# Altium PCB main_PCB_v2.0.PcbDoc
Units mil, origin at the board's own origin, x right, y up, seen from the top; angles counter-clockwise.
Board outline 2000 x 1575 mil, 2 copper layers (Top Layer, Bottom Layer); 8 components, 10 nets, 78 pads, 0 vias.
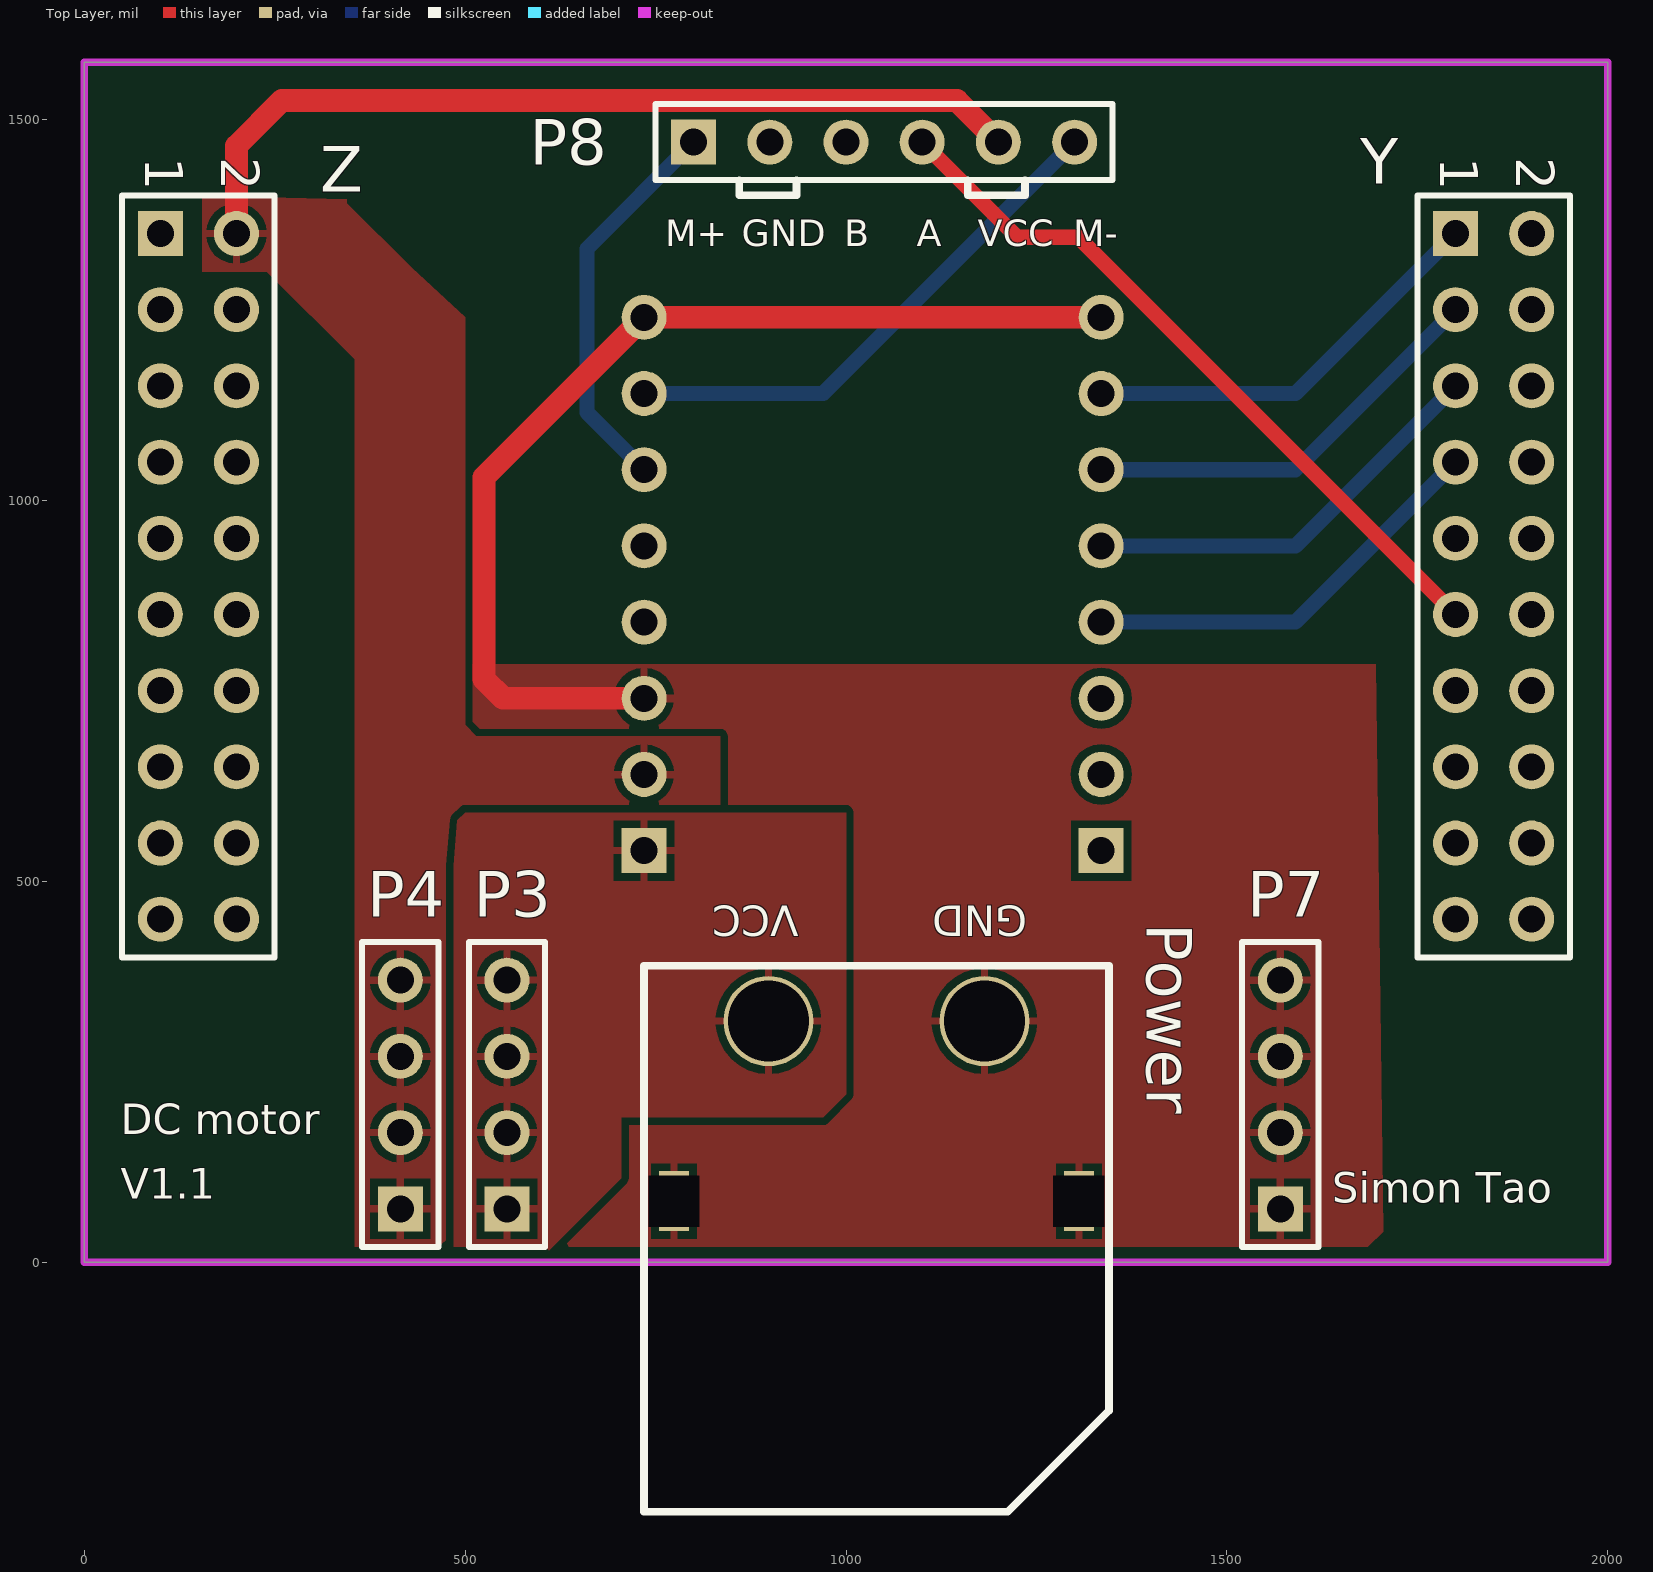
[diagram p0: Top Layer view]
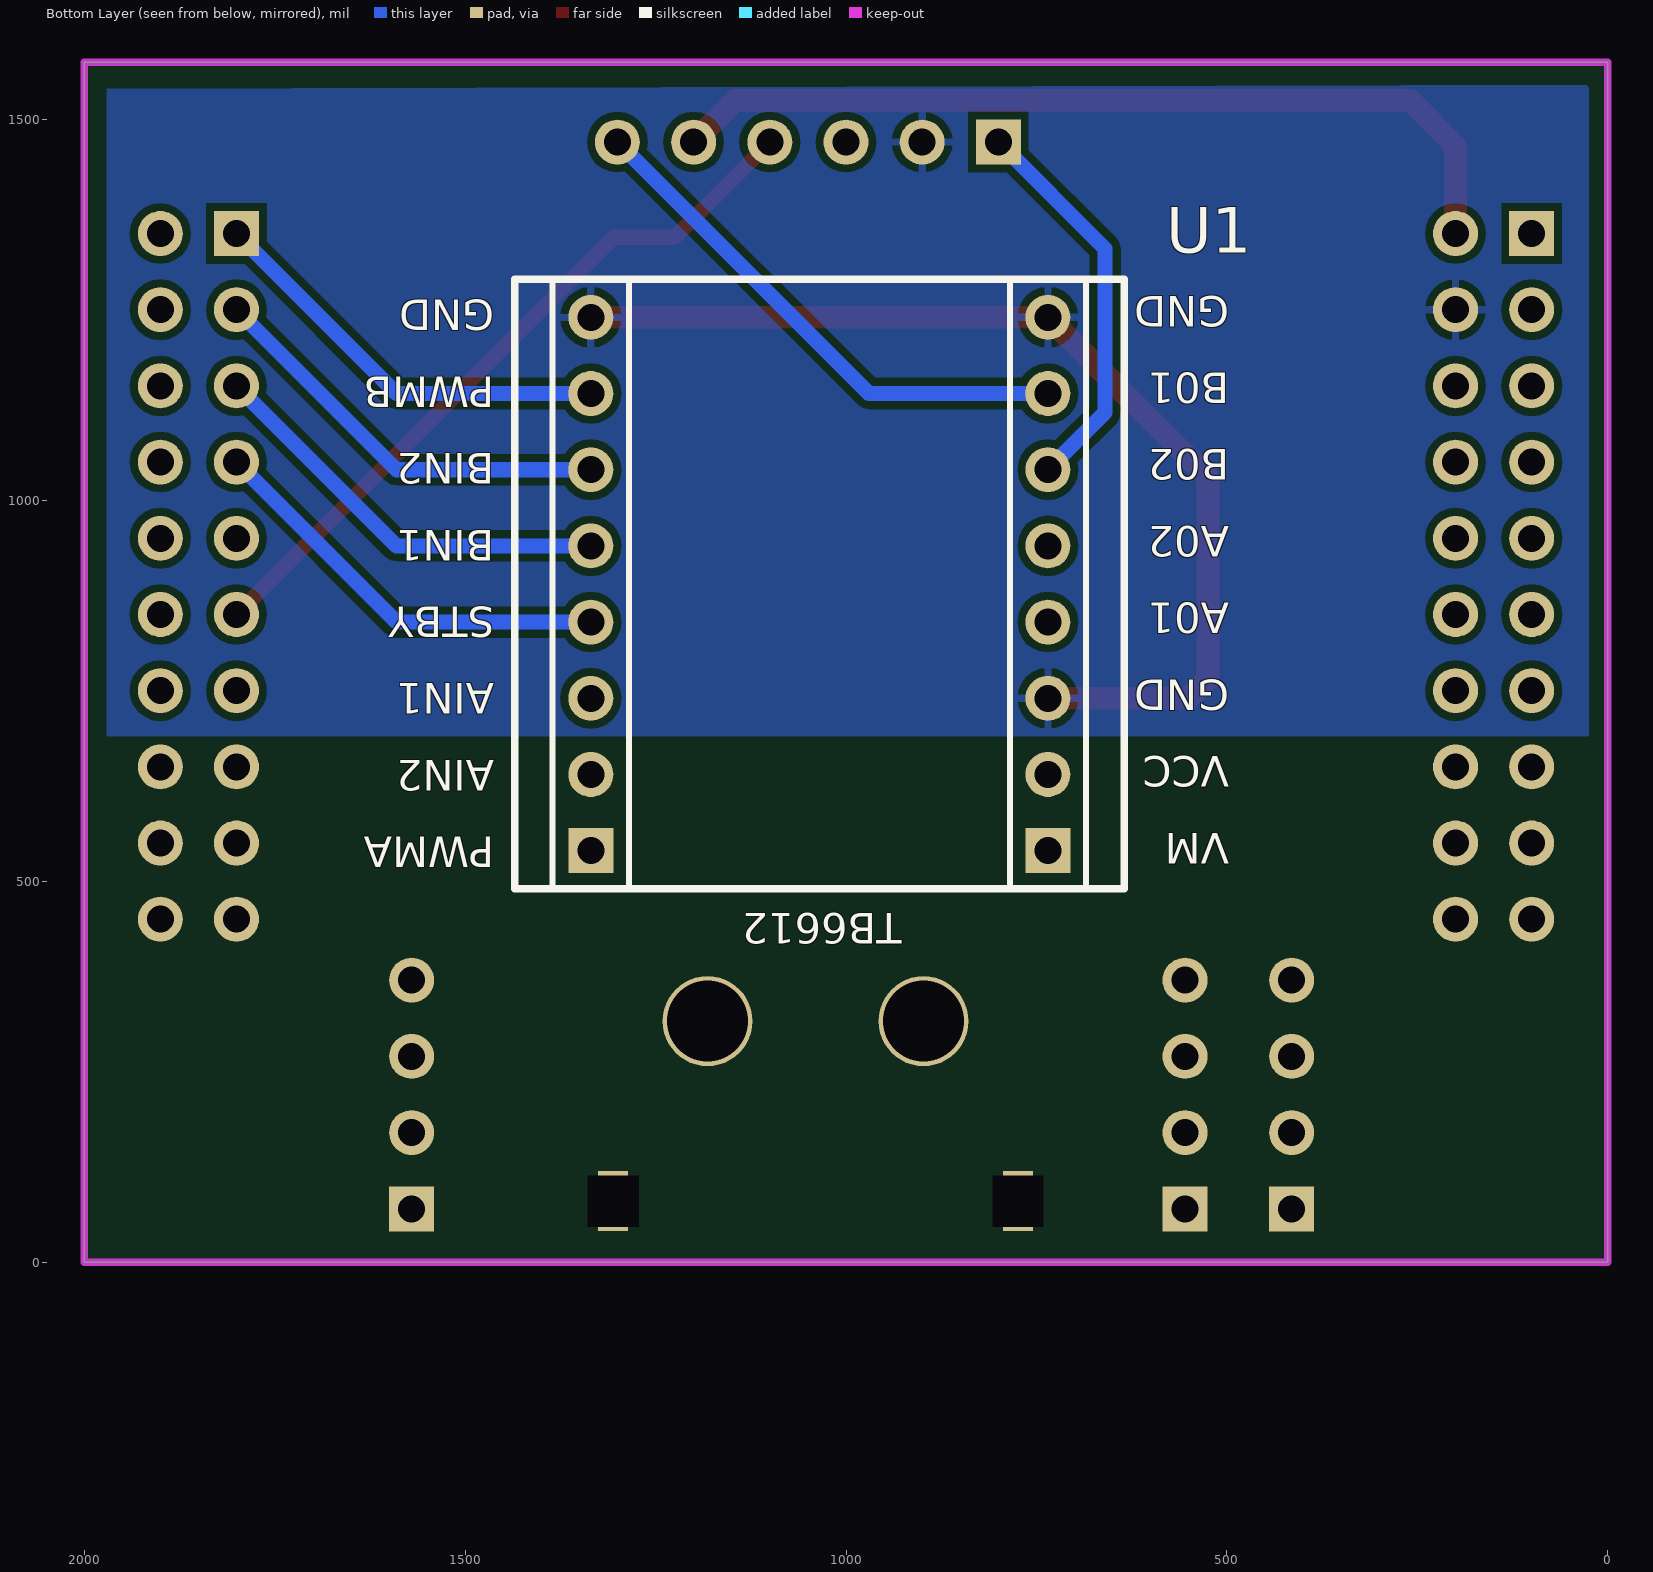
[diagram p1: Bottom Layer view, seen from below]

## Layer stack, top to bottom
Top Solder: solder mask 0.4, Solder Resist, Dk 3.5
Top Layer: signal copper 1.4
Dielectric 1: dielectric 12.6, FR-4, Dk 4.8
Bottom Layer: signal copper 1.4
Bottom Solder: solder mask 0.4, Solder Resist, Dk 3.5

## Board outline
0,0 2000,0 2000,1575 0,1575

## Design rules (kind name [scope] priority, off if disabled: settings)
Clearance [All] p1: gap=10 ignorepadtopadclearanceinfootprint=FALSE except(0: Arc-Hole Track-Hole SMDPad-Hole THPad-Hole Via-Hole Fill-Hole Poly-Hole Region-Hole Text-Hole)
PolygonConnect [All] p1: connectstyle=Relief reliefconductorwidth=10 reliefentries=4 polygonreliefangle="90 Angle" airgapwidth=10
RoutingVias [All] p1: holewidth=28 width=50 viastyle="Through Hole" minholewidth=28 minwidth=50 maxholewidth=28 maxwidth=50
SolderMaskExpansion [All] p1: expansion=4 istentingtop=FALSE
Width [All] p1: maxlimit=100 minlimit=10 preferedwidth=20
30 further rules are at their usual default settings.

## Components (designator, comment, footprint, x,y, rotation, side; value= is the part's Value field where it differs from the comment)
P3 "Header 4" HDR1X4 555,70 r90 top
P4 "Header 4" HDR1X4 415,70 r90 top
P7 "Header 4" HDR1X4 1570,70 r90 top
P8 "Header 6" HDR1X6 800,1470 r0 top
Power "XT60-PW" XT60-PW 1040,80 r180 top
U1 "TB6612_mod" TB6612_mod 1035,905 r0 bottom
Y "Header 10X2" HDR2X10 1800,1350 r270 top
Z "Header 10X2" HDR2X10 100,1350 r270 top

## Footprints (in the part's own frame and the unit in brackets; to place one, negate y for a bottom-side part, rotate by r counter-clockwise, add the part's x,y. Pads: shape width x height; smd on the part's side, far side on the other; paste and mask are expansions set on the pad)
HDR1X4 [mm] "Connector; Header; 4 Position"
  rect 1.5x1.5 hole 0.9: 1(0,0)
  round 1.5 hole 0.9: 2(2.54,0) 3(5.08,0) 4(7.62,0)
  silkscreen extent -1.27,-1.27 8.89,1.27
HDR1X6 [mm] "Connector; Header; 6 Position"
  rect 1.5x1.5 hole 0.9: 1(0,0)
  round 1.5 hole 0.9: 2(2.54,0) 3(5.08,0) 4(7.62,0) 5(10.16,0) 6(12.7,0)
  silkscreen extent -1.27,-1.27 13.97,1.27
HDR2X10 [mm] "Connector; Header; 10x2 Position"
  rect 1.5x1.5 hole 0.9: 1(0,0)
  round 1.5 hole 0.9: 2(0,2.54) 3(2.54,0) 4(2.54,2.54) 5(5.08,0) 6(5.08,2.54) 7(7.62,0) 8(7.62,2.54) 9(10.16,0) 10(10.16,2.54) 11(12.7,0) 12(12.7,2.54) 13(15.24,0) 14(15.24,2.54) 15(17.78,0) 16(17.78,2.54) 17(20.32,0) 18(20.32,2.54) 19(22.86,0) 20(22.86,2.54)
  silkscreen extent -1.27,-1.27 24.13,3.81
TB6612_mod [mm]
  rect 1.5x1.5 hole 0.9: 1(-7.62,9.27) 16(7.62,9.271)
  round 1.5 hole 0.9: 2(-7.62,6.73) 3(-7.62,4.19) 4(-7.62,1.65) 5(-7.62,-0.89) 6(-7.62,-3.43) 7(-7.62,-5.97) 8(-7.62,-8.51) 9(7.62,-8.509) 10(7.62,-5.969) 11(7.62,-3.429) 12(7.62,-0.889) 13(7.62,1.651) 14(7.62,4.191) 15(7.62,6.731)
  silkscreen extent -10.16,-9.78 10.16,10.54
XT60-PW [mm]
  rect 1x2 hole 1.7 square: 1(-6.75,0) 1(6.75,0)
  round 3 hole 2.7: 1(-3.6,-6) 2(3.6,-6)
  silkscreen extent -7.75,-7.85 7.75,10.35

## Part data
P3 P4 P7: "Header, 4-Pin", LatestRevisionDate=17-Jul-2002, LatestRevisionNote="Re-released for DXP Platform.", Publisher="Altium Limited"
P8: "Header, 6-Pin", LatestRevisionDate=17-Jul-2002, LatestRevisionNote="Re-released for DXP Platform.", Publisher="Altium Limited"
Y Z: "Header, 10-Pin, Dual row", LatestRevisionDate=17-Jul-2002, LatestRevisionNote="Re-released for DXP Platform.", Publisher="Altium Limited"

## Nets (pads, with @x,y where several pads share a name; then routed paths per layer and width w, separated by ;. In a path a pad name is that pad's centre, name@x,y a point inside that pad or via, vN(x,y) a via of type N, cw(c..) or ccw(c..) an arc to the next point about the centre after c; other vN are vias at no path point)
+12: P3.1 P3.2 P3.3 P3.4 Power.2 U1.1
A: P8.4 Y.11 | length 956.8
  Top Layer w20: P8.4 1225,1345 1305,1345 Y.11
B01: P8.6 U1.7 | length 701.7
  Bottom Layer w20: U1.7 970.04,1140.04 P8.6
B02: P8.1 U1.6 | length 519
  Bottom Layer w20: U1.6 660,1115.04 660,1330 P8.1
BIN1: U1.12 Y.5 | length 552
  Bottom Layer w20: U1.12 1590,940 Y.5
BIN2: U1.11 Y.3 | length 552
  Bottom Layer w20: U1.11 1590,1040 Y.3
GND: P7.1 P7.2 P7.3 P7.4 P8.2 Power.1 U1.3 U1.8 U1.9 Z.4 | length 1382.4
  Top Layer w30: U1.3 549.96,740.04 525,765 525,1030.04 U1.8 ; U1.8 U1.9
PWMB: U1.10 Y.1 | length 552
  Bottom Layer w20: U1.10 1590,1140 Y.1
STBY: U1.13 Y.7 | length 552
  Bottom Layer w20: U1.13 1590,840 Y.7
VCC: P4.1 P4.2 P4.3 P4.4 P8.5 U1.2 Z.2 | length 1162.2
  Top Layer w30: Z.2 200,1465 259.53,1524.53 1145.47,1524.53 P8.5
pads on no net: P8.3 U1.4 U1.5 U1.14 U1.15 U1.16 Y.2 Y.4 Y.6 Y.8 Y.9 Y.10 Y.12 Y.13 Y.14 Y.15 Y.16 Y.17 Y.18 Y.19 Y.20 Z.1 Z.3 Z.5 Z.6 Z.7 Z.8 Z.9 Z.10 Z.11 Z.12 Z.13 Z.14 Z.15 Z.16 Z.17 Z.18 Z.19 Z.20

## Polygon pours and split planes (outlines as drawn)
GND on Top Layer "GND_L01_P003" (solid, remove dead copper, pour order 3): 490,785 490,20 1685,20 1705,40 1695,785
VCC on Top Layer "VCC_L01_P001" (solid, remove dead copper, pour order 1): 155,1400 155,1300 240,1300 355,1185 355,20 465,20 835,342.77 835,690 515,690 500,705 500,1240 430,1305 345,1390 345,1395
+12 on Top Layer "+12_L01_P000" (solid, remove dead copper, pour order 0): 490,580 500,590 1000,590 1000,220 970,190 705,190 705,110 610,15 605,20 485,20 485,520
GND on Bottom Layer "GND_L02_P004" (solid, remove dead copper, pour order 4): 25,1545 25,690 1970,690 1970,1540

## Keep-outs
Keep-Out Layer:
  the board outline again, w10

## Silkscreen, mask and mechanical layers (free items; w line width, h text height)
Top Overlay:
  lines w10: 860,1420 860,1400 935,1400 935,1420 ; 1160,1420 1160,1400 1235,1400 1235,1420
  text "M+" at 763,1333 h35
  text "GND" at 863,1333 h35
  text "B" at 998,1333 h35
  text "A" at 1093,1333 h35
  text "VCC" at 1173,1333 h35
  text "M-" at 1298,1333 h35
  text "DC motor" at 48,168 h40
  text "V1.1" at 48,83 h40
  text "Simon Tao" at 1638,78 h40
Mechanical 1:
  the board outline again, w10

## Text inside footprints (layer, text, board x,y; h text height)
Power: Top Overlay "GND" at 1238,468 h40 r180; Top Overlay "VCC" at 938,468 h40 r180
U1: Bottom Overlay "VM" at 497,563 h40 r180; Bottom Overlay "VCC" at 497,663.71 h40 r180; Bottom Overlay "GND" at 497,764.43 h40 r180; Bottom Overlay "A01" at 497,865.14 h40 r180; Bottom Overlay "A02" at 497,965.86 h40 r180; Bottom Overlay "B02" at 497,1066.57 h40 r180; Bottom Overlay "B01" at 497,1167.29 h40 r180; Bottom Overlay "GND" at 497,1268 h40 r180; Bottom Overlay "TB6612" at 927,458 h40 r180; Bottom Overlay "PWMA" at 1462,558 h40 r180; Bottom Overlay "AIN2" at 1462,658.71 h40 r180; Bottom Overlay "AIN1" at 1462,759.43 h40 r180; Bottom Overlay "STBY" at 1462,860.14 h40 r180; Bottom Overlay "BIN1" at 1462,960.86 h40 r180; Bottom Overlay "BIN2" at 1462,1061.57 h40 r180; Bottom Overlay "PWMB" at 1462,1162.29 h40 r180; Bottom Overlay "GND" at 1462,1263 h40 r180
Y: Top Overlay "1" at 1780,1450 h50 r270; Top Overlay "2" at 1880,1450 h50 r270
Z: Top Overlay "1" at 80,1450 h50 r270; Top Overlay "2" at 180,1450 h50 r270